# Altium PCB CW308T_MSP430FR5xxx.PcbDoc
Units mil, origin at the board's own origin, x right, y up, seen from the top; angles counter-clockwise.
Board outline 2060 x 2540 mil, 2 copper layers (Top Layer, Bottom Layer); 13 components, 36 nets, 174 pads, 112 vias.
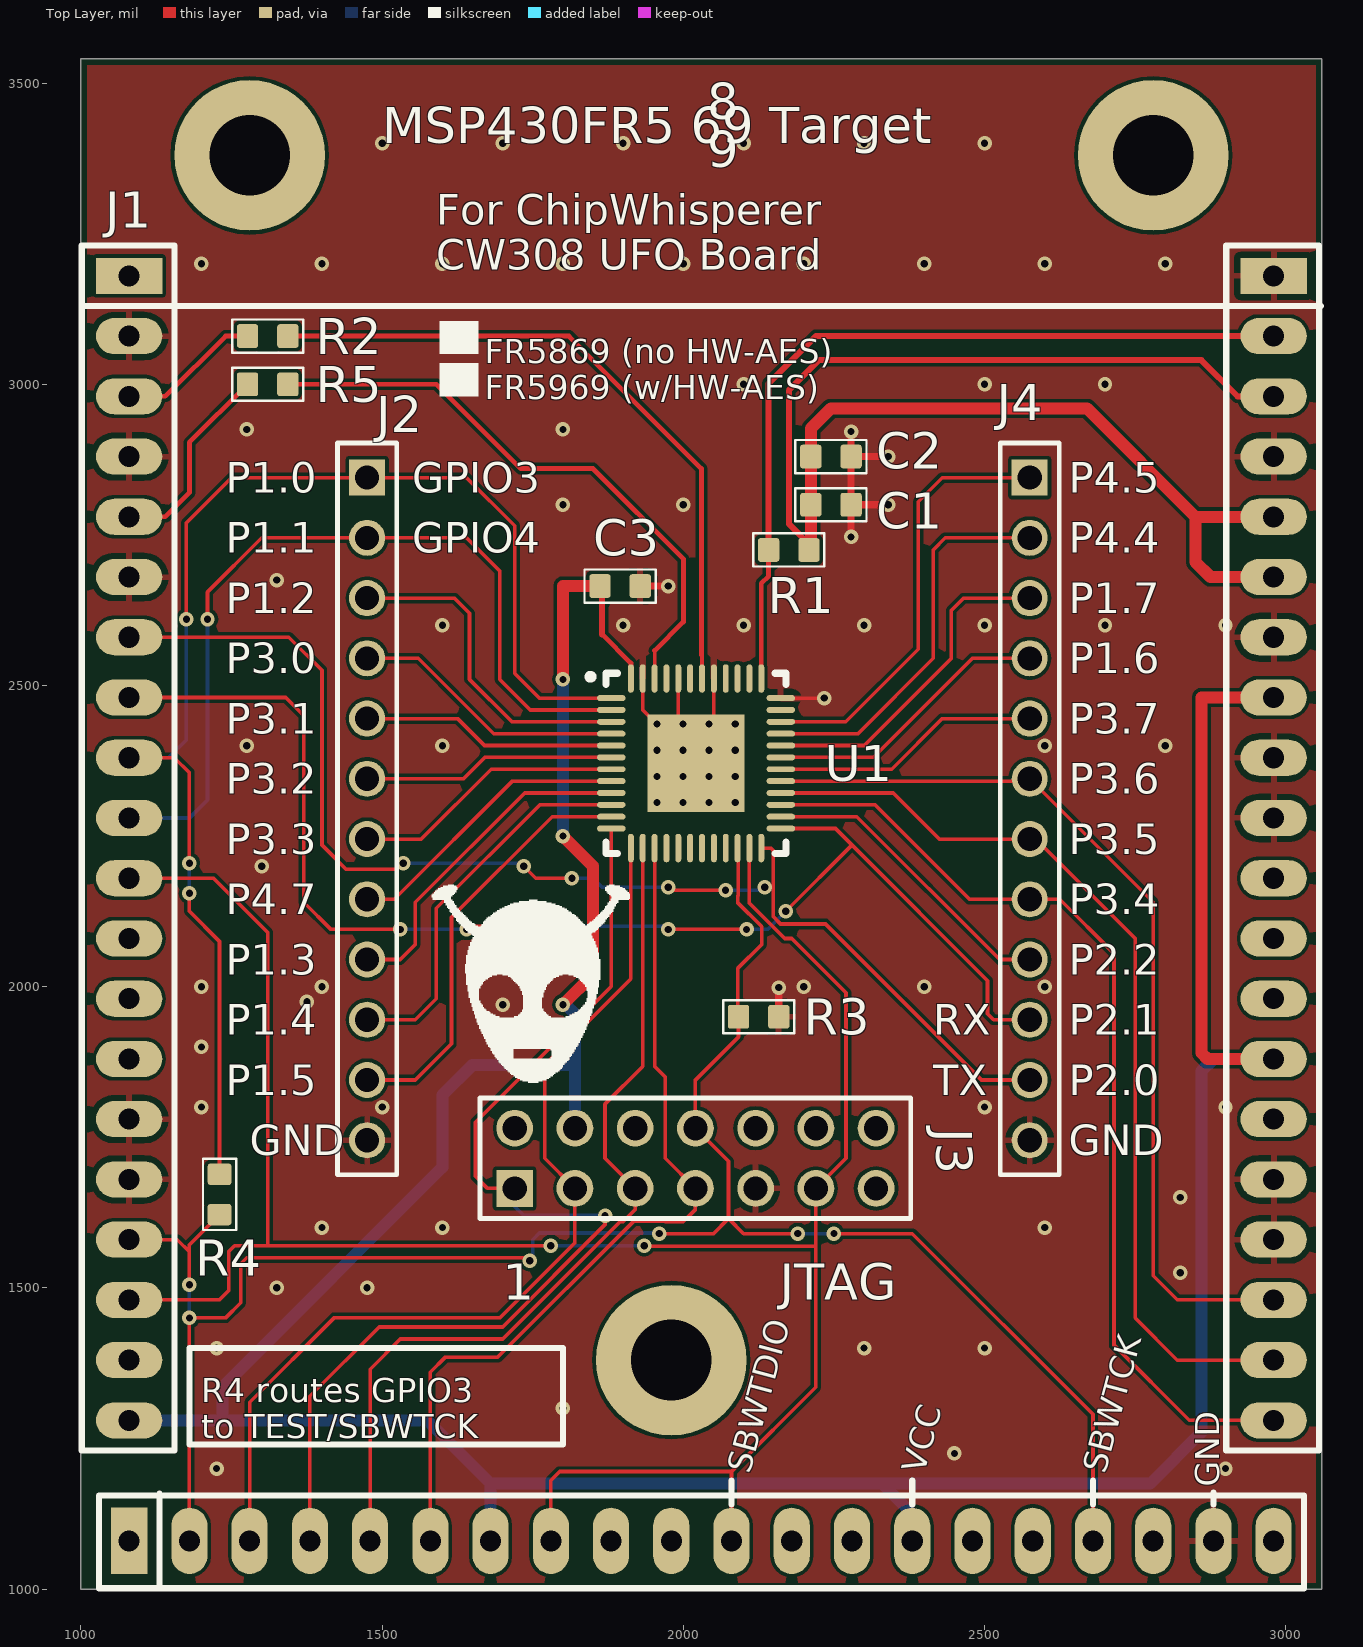
[diagram p0: Top Layer view]
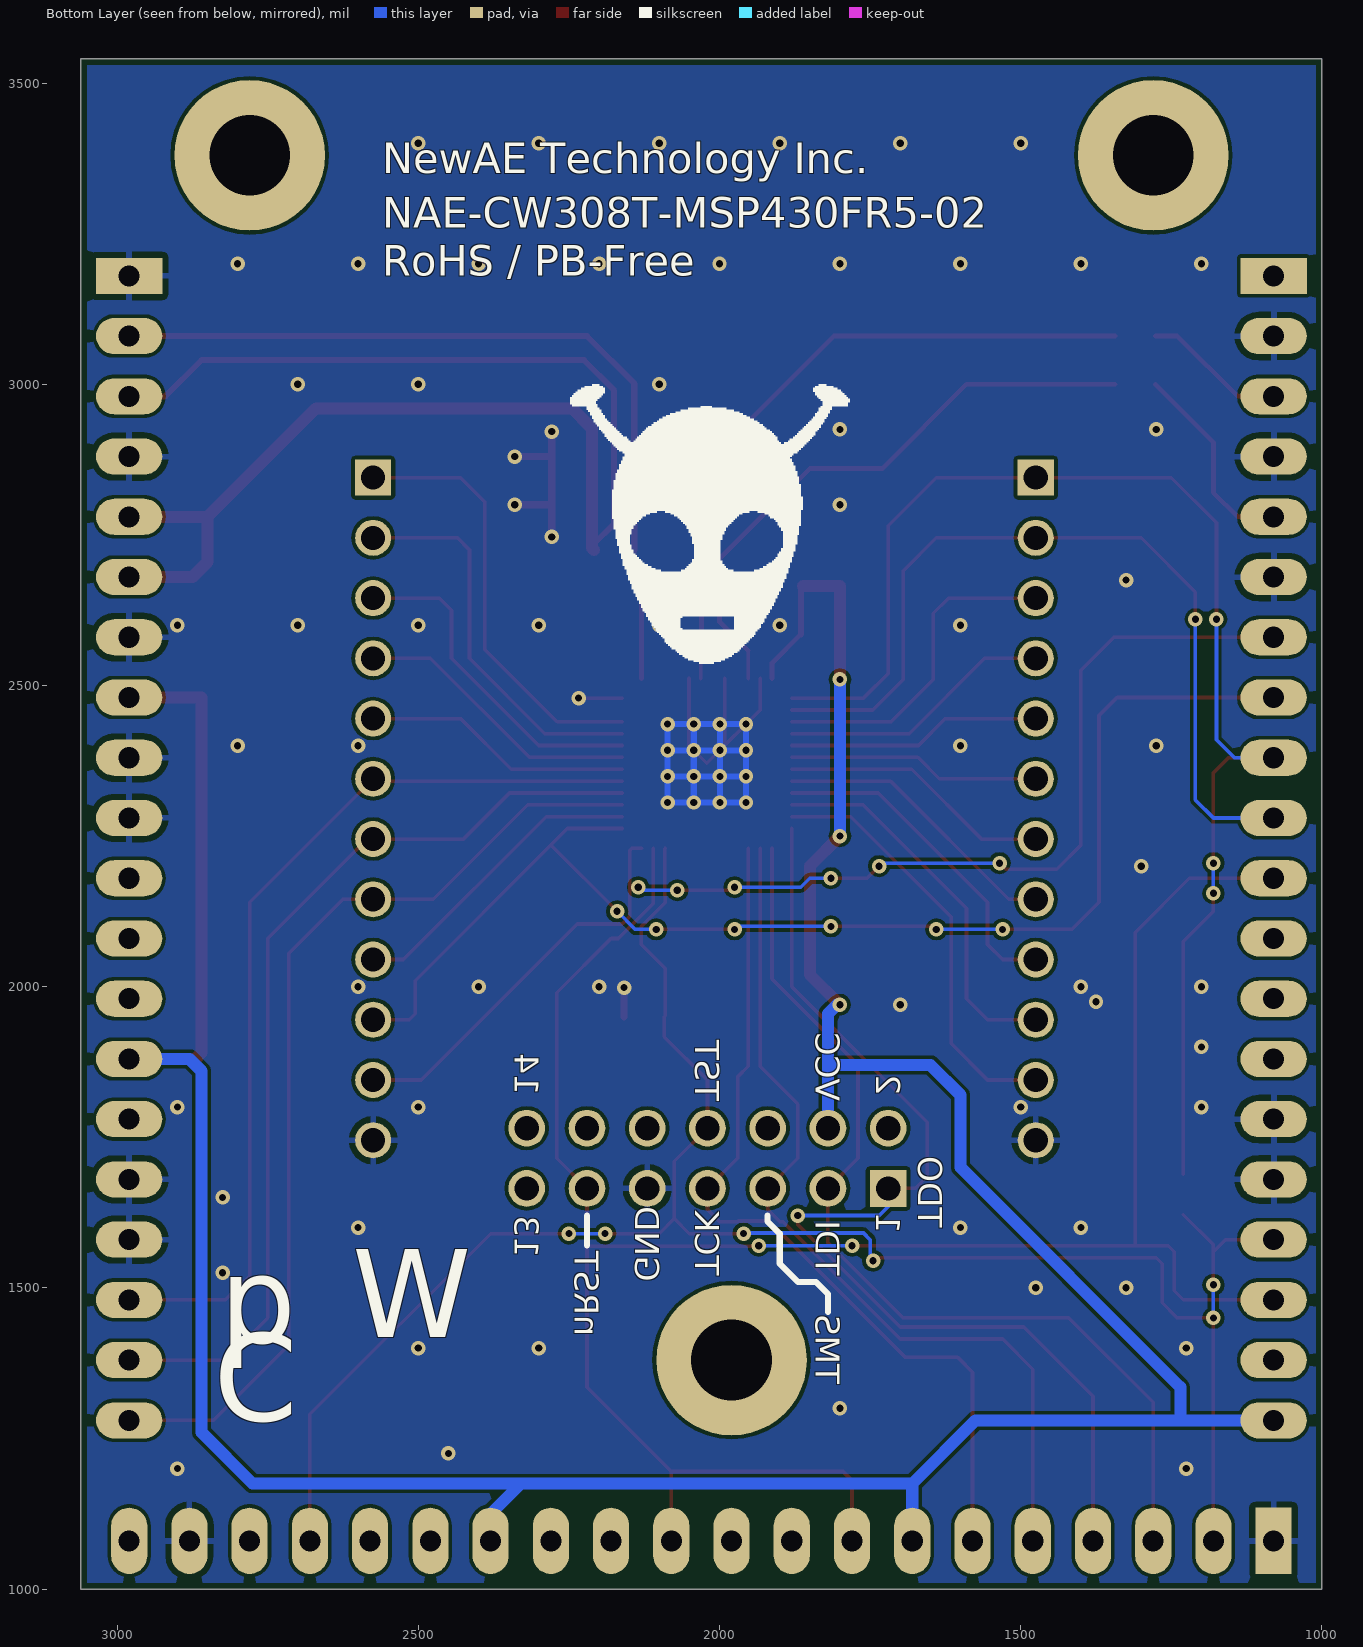
[diagram p1: Bottom Layer view, seen from below]

## Layer stack, top to bottom
Top Solder: solder mask 0.4, Solder Resist, Dk 3.5
Top Layer: signal copper 1.4
Dielectric 1: dielectric 12.6, FR-4, Dk 4.8
Bottom Layer: signal copper 1.4
Bottom Solder: solder mask 0.4, Solder Resist, Dk 3.5

## Board outline
1000,1000 1000,3540 3060,3540 3060,1000

## Design rules (kind name [scope] priority, off if disabled: settings)
BoardOutlineClearance [All] p1: gap=10 ignorepadtopadclearanceinfootprint=FALSE except(0: Arc-SplitContinuation Track-SplitContinuation SMDPad-SplitContinuation THPad-SplitContinuation Via-SplitContinuation Fill-SplitContinuation Poly-SplitContinuation Region-SplitContinuation Text-SplitContinuation)
Clearance [All] p1: gap=6 ignorepadtopadclearanceinfootprint=FALSE except(0: Arc-Hole Track-Hole SMDPad-Hole THPad-Hole Via-Hole Fill-Hole Poly-Hole Region-Hole Text-Hole)
PolygonConnect PolygonConnect_1 [All] p1: thpad.connectstyle=Relief thpad.reliefconductorwidth=10 thpad.reliefentries=4 thpad.polygonreliefangle="90 Angle" thpad.airgapwidth=10 smdpad.connectstyle=Relief smdpad.reliefconductorwidth=10 smdpad.reliefentries=4 smdpad.polygonreliefangle="90 Angle" smdpad.airgapwidth=10 via.connectstyle=Direct via.reliefconductorwidth=10 via.reliefentries=4 via.polygonreliefangle="90 Angle" via.airgapwidth=10
PolygonConnect [All] p2: connectstyle=Relief reliefconductorwidth=10 reliefentries=4 polygonreliefangle="90 Angle" airgapwidth=10
RoutingVias [All] p1: holewidth=15 width=30 viastyle="Through Hole" minholewidth=12 minwidth=24 maxholewidth=28 maxwidth=50
SolderMaskExpansion [All] p1: expansion=4
Width [All] p1: maxlimit=100 minlimit=6 preferedwidth=10 minimp=50.000000 maximp=50.000000 favimp=50.000000
30 further rules are at their usual default settings.

## Components (designator, comment, footprint, x,y, rotation, side; value= is the part's Value field where it differs from the comment)
C1 "approved sub OK" CAPC1608X90N 2245,2800 r0 top value=100n
C2 "approved sub OK" CAPC1608X90N 2245,2880 r0 top value=100n
C3 "approved sub OK" CAPC1608X90N 1895,2665 r0 top value=100n
J1 "CW308_TARGETCON" CW308_TBOARD_CONN 1080,3180 r0 top locked
J2 "MTLW-112-07-F-S-125" SMTC-MTLW-112-07-X-S-125 1475,2845 r270 top
J3 "TSW-107-06-G-D" SMTC-TSW-107-06-X-D 1720,1665 r0 top
J4 "MTLW-112-07-F-S-125" SMTC-MTLW-112-07-X-S-125 2575,2845 r270 top
R1 "Thick Film" RESC1608X55N 2175,2725 r180 top value=51R
R2 "Thick Film" RESC1608X55N 1310,3080 r180 top value=51R
R3 "Thick Film" RESC1608X55N 2125,1950 r0 top value=4K7
R4 "Thick Film" RESC1608X55N 1230,1655 r270 top value=DNM
R5 "Thick Film" RESC1608X55N 1310,3000 r180 top value=51R
U1 "MSP430FR5869" QFN50P700X700X100_HS-49M 2021.1,2370.75 r0 top

## Footprints (in the part's own frame and the unit in brackets; to place one, negate y for a bottom-side part, rotate by r counter-clockwise, add the part's x,y. Pads: shape width x height; smd on the part's side, far side on the other; paste and mask are expansions set on the pad)
CAPC1608X90N [mm] "Chip Capacitor, Body 1.6x0.8mm, EIA 0603, IPC Medium Density"
  round 0.254 on Mech15: 0(0,0)
  rrect25% 0.9x1 smd: 1(-0.85,0) 2(0.85,0)
  Top Layer pour cut-out: -0.6,0.5 -0.4,0.7 0.4,0.7 0.6,0.5 0.6,-0.5 0.4,-0.7 -0.4,-0.7 -0.6,-0.5
  silkscreen extent -1.5,-0.7 1.5,0.7, body extent -0.85,-0.45 0.85,0.45, height 0.89
CW308_TBOARD_CONN [mil]
  rect 110x60 hole 35: A1(0,0) C1(1900,0)
  oval 110x60 hole 35: A2(0,-100) A3(0,-200) A4(0,-300) A5(0,-400) A6(0,-500) A7(0,-600) A8(0,-700) A9(0,-800) A10(0,-900) A11(0,-1000) A12(0,-1100) A13(0,-1200) A14(0,-1300) A15(0,-1400) A16(0,-1500) A17(0,-1600) A18(0,-1700) A19(0,-1800) A20(0,-1900) C2(1900,-100) C3(1900,-200) C4(1900,-300) C5(1900,-400) C6(1900,-500) C7(1900,-600) C8(1900,-700) C9(1900,-800) C10(1900,-900) C11(1900,-1000) C12(1900,-1100) C13(1900,-1200) C14(1900,-1300) C15(1900,-1400) C16(1900,-1500) C17(1900,-1600) C18(1900,-1700) C19(1900,-1800) C20(1900,-1900)
  rect 60x110 hole 35: B1(0,-2100)
  oval 60x110 hole 35: B2(100,-2100) B3(200,-2100) B4(300,-2100) B5(400,-2100) B6(500,-2100) B7(600,-2100) B8(700,-2100) B9(800,-2100) B10(900,-2100) B11(1000,-2100) B12(1100,-2100) B13(1200,-2100) B14(1300,-2100) B15(1400,-2100) B16(1500,-2100) B17(1600,-2100) B18(1700,-2100) B19(1800,-2100) B20(1900,-2100)
  round 250 hole 134: MH1(200,200) MH2(900,-1800) MH2(1700,200)
  silkscreen extent -79,-2179 1979,50, body extent -50,-2150 1950,50, height 224
QFN50P700X700X100_HS-49M [mm] "QFN, 48-Leads, Body 7.00x7.00mm, Pitch 0.50mm, Thermal Pad 4.10x4.10mm, IPC Low Density"
  oval 1.2x0.25 smd: 1(-3.575,2.75) 2(-3.575,2.25) 3(-3.575,1.75) 4(-3.575,1.25) 5(-3.575,0.75) 6(-3.575,0.25) 7(-3.575,-0.25) 8(-3.575,-0.75) 9(-3.575,-1.25) 10(-3.575,-1.75) 11(-3.575,-2.25) 12(-3.575,-2.75) 25(3.575,-2.75) 26(3.575,-2.25) 27(3.575,-1.75) 28(3.575,-1.25) 29(3.575,-0.75) 30(3.575,-0.25) 31(3.575,0.25) 32(3.575,0.75) 33(3.575,1.25) 34(3.575,1.75) 35(3.575,2.25) 36(3.575,2.75)
  oval 0.25x1.2 smd: 13(-2.75,-3.575) 14(-2.25,-3.575) 15(-1.75,-3.575) 16(-1.25,-3.575) 17(-0.75,-3.575) 18(-0.25,-3.575) 19(0.25,-3.575) 20(0.75,-3.575) 21(1.25,-3.575) 22(1.75,-3.575) 23(2.25,-3.575) 24(2.75,-3.575) 37(2.75,3.575) 38(2.25,3.575) 39(1.75,3.575) 40(1.25,3.575) 41(0.75,3.575) 42(0.25,3.575) 43(-0.25,3.575) 44(-0.75,3.575) 45(-1.25,3.575) 46(-1.75,3.575) 47(-2.25,3.575) 48(-2.75,3.575)
  rect 4.1x4.1 smd: 49(0,0)
  silkscreen extent -4.57,-3.8 3.8,3.8, body extent -3.58,-3.58 3.58,3.58, height 1
RESC1608X55N [mm] "Chip Resistor, Body 1.6x0.8mm, EIA 0603, IPC Medium Density"
  round 0.254 on Mech15: 0(0,0)
  rrect25% 0.9x1 smd: 1(-0.85,0) 2(0.85,0)
  Top Layer pour cut-out: -0.6,0.5 -0.4,0.7 0.4,0.7 0.6,0.5 0.6,-0.5 0.4,-0.7 -0.4,-0.7 -0.6,-0.5
  silkscreen extent -1.5,-0.7 1.5,0.7, body extent -0.87,-0.47 0.88,0.48, height 0.54
SMTC-MTLW-112-07-X-S-125 [mm] "Terminal Assembly, 1x12 Pins, Vertical, 2.54mm Pitch, Male"
  rect 1.52x1.52 hole 1.02: 1(0,0)
  round 1.52 hole 1.02: 2(2.54,0) 3(5.08,0) 4(7.62,0) 5(10.16,0) 6(12.7,0) 7(15.24,0) 8(17.78,0) 9(20.32,0) 10(22.86,0) 11(25.4,0) 12(27.94,0)
  silkscreen extent -1.46,-1.24 29.4,1.24, body extent -1.27,-1.24 29.21,1.24, height 4.7
SMTC-TSW-107-06-X-D [mm] ".025 SQ Post Terminal Strip Assembly, 2x7 Pins, Vertical, 2.54mm Pitch, Male"
  rect 1.55x1.55 hole 1.02: 1(0,0)
  round 1.55 hole 1.02: 2(0,2.54) 3(2.54,0) 4(2.54,2.54) 5(5.08,0) 6(5.08,2.54) 7(7.62,0) 8(7.62,2.54) 9(10.16,0) 10(10.16,2.54) 11(12.7,0) 12(12.7,2.54) 13(15.24,0) 14(15.24,2.54)
  silkscreen extent -1.46,-1.27 16.7,3.81, body extent -1.27,-1.27 16.51,3.81, height 5.21

## Part data
C1 C2 C3: library part CAPC_100n_0603_X7R_50V_10%, "Capacitor SMD Cer 100nF 10% 50V X7R 0603", Manufacturer 1="AVX Corporation", Manufacturer 2="TDK Corporation", Manufacturer Part Number 1=06035C104KAT2A, Manufacturer Part Number 2=C1608X7R1H104K, Package / Case="0603 (1608 Metric)", Ratings="50V; X7R", Supplier Part Number 1=478-5052-1-ND, Tolerance=±10%, ComponentLink1Description=http://www.avx.com/docs/Catalogs/cx7r.pdf, ComponentLink1URL=http://www.avx.com/docs/Catalogs/cx7r.pdf, ComponentLink2Description=http://product.tdk.com/capacitor/mlcc/en/documents/mlcc_commercial_general_en.pdf, ComponentLink2URL=http://product.tdk.com/capacitor/mlcc/en/documents/mlcc_commercial_general_en.pdf, Material=ceramic, SCDType=spec, Supplier 1=Digi-Key, Supplier 2=Digi-Key, Supplier Part Number 2=445-1314-1-ND
J1: library part CW308_TBOARD, "CW308 \"Standard\" Target Board Connector"
J2 J4: library part CMP-1024-00086-1, Manufacturer=Samtec, Temperature Range="-55 to 125 degC", ComponentLink1Description="Manufacturer URL", ComponentLink1URL=http://www.samtec.com, ComponentLink2Description=Datasheet, ComponentLink2URL=http://www.samtec.com/documents/webfiles/pdf/MTLW_TH.PDF, ComponentLink3Description="Package Specification", ComponentLink3URL=http://www.samtec.com/documents/webfiles/cpdf/MTLW-1XX-XX-XX-X-XXX-XX-XX-MKT1.pdf, DatasheetVersion=F-214, Mounting Technology=Through-hole, Orientation=Vertical, PackageDescription="Low Profile Terminal Assembly", PackageReference=MTLW-112-07-X-S-125, PackageVersion="T, 6/1991", PartNumber=MTLW-112-07-F-S-125, Pitch="2.54 mm", RoHS=True
J3: library part CMP-1024-00403-1, Manufacturer=Samtec, Temperature Range="-55 to 125 degC", ComponentLink1Description="Manufacturer URL", ComponentLink1URL=http://www.samtec.com, ComponentLink2Description=Datasheet, ComponentLink2URL=http://www.samtec.com/documents/webfiles/pdf/TSW_TH.PDF, ComponentLink3Description="Package Specification", ComponentLink3URL=http://www.samtec.com/documents/webfiles/cpdf/TSW-XXX-XX-XXX-X-XX-XXX-MKT.pdf, DatasheetVersion=F-214, Mounting Technology=Through-hole, Orientation=Vertical, PackageDescription=".025[0.64] SQ. Post Terminal Strip Assembly", PackageReference=TSW-107-06-X-D, PackageVersion="DM, 8/1988", PartNumber=TSW-107-06-G-D, Pitch="2.54 mm", RoHS=True
R1 R2 R4 R5: library part RES_51R_0603_1%, "Resistor SMD chip 51 Ohm 0.1W 1% 0603", Manufacturer 1=Yageo, Manufacturer Part Number 1=RC0603FR-0751RL, Package / Case="0603 (1608 metric)", Ratings="1/10 W", Supplier Part Number 1=311-51.0HRCT-ND, Tolerance=±1%, Material="Thick Film", SCDType=spec, Supplier 1=Digi-Key
R3: library part RES_4K7_0603_5%, "Resistor SMD chip 4.7k Ohm 0.1W 5% 0603", Manufacturer 1=Vishay/Dale, Manufacturer Part Number 1=CRCW06034K70JNEA, Package / Case="0603 (1608 metric)", Ratings="1/10 W", Supplier Part Number 1=541-4.7KGCT-ND, Tolerance=±5%, Material="Thick Film", SCDType=spec, Supplier 1=Digi-Key
U1: library part MSP430FR869, "MSP430, 16-bit MCU, FR sram"

## Via types
v1: diameter 24, hole 12, Top Layer to Bottom Layer, tented both sides, 67 vias
v2: diameter 24, hole 12, Top Layer to Bottom Layer, 29 vias
v3: diameter 23.62, hole 11.81, Top Layer to Bottom Layer, 16 vias

## Nets (pads, with @x,y where several pads share a name; then routed paths per layer and width w, separated by ;. In a path a pad name is that pad's centre, name@x,y a point inside that pad or via, vN(x,y) a via of type N, cw(c..) or ccw(c..) an arc to the next point about the centre after c; other vN are vias at no path point)
GND: C1.2 C2.2 C3.2 J1.A2 J1.A4 J1.A6 J1.A15 J1.A16 J1.B1 J1.B19 J1.C1 J1.C4 J1.C7 J1.C9 J1.C10 J1.C16 J1.C17 J2.12 J3.9 J4.12 R3.2 U1.36 U1.41 U1.44 U1.47 U1.49 | length 1935.1
  Top Layer w6: U1.47 1932.52,2459.33 v3(1956.14,2435.71) U1.49@1991.57,2400.28 ; U1.44 U1.49@1991.57,2400.28 ; v3(2042.76,2392.4) U1.49 v3(1999.45,2392.4) U1.49@1991.57,2400.28 ; U1.49@2050.63,2400.28 U1.41 ; U1.36 v1(2234.02,2479.02)
  Top Layer w12: C3.2 v1(1975,2665) ; R3.2 v1(2158.46,1998.46) ; v1(2278.46,2746.54) C1.2 ; v1(2278.46,2921.54) C2.2 ; v1(2340,2800) C1.2 ; v1(2340,2880) C2.2 ; C1.2 C2.2
  Bottom Layer w10: v3(1956.14,2349.09) v3(1999.45,2349.09) ; v3(1956.14,2349.09) v3(1956.14,2392.4) ; v3(1956.14,2349.09) v3(1956.14,2305.79) v3(1999.45,2305.79) ; v3(1956.14,2392.4) v3(1999.45,2392.4) ; v3(1956.14,2392.4) v3(1956.14,2435.71) v3(1999.45,2435.71) ; v3(1999.45,2305.79) v3(1999.45,2349.09) ; v3(1999.45,2305.79) v3(2042.76,2305.79) ; v3(1999.45,2349.09) v3(1999.45,2392.4) ; v3(1999.45,2349.09) v3(2042.76,2349.09) ; v3(1999.45,2392.4) v3(1999.45,2435.71) ; v3(1999.45,2392.4) v3(2042.76,2392.4) ; v3(1999.45,2435.71) v3(2042.76,2435.71) ; v3(2042.76,2305.79) v3(2042.76,2349.09) ; v3(2042.76,2305.79) v3(2086.06,2305.79) v3(2086.06,2349.09) ; v3(2042.76,2349.09) v3(2042.76,2392.4) ; v3(2042.76,2349.09) v3(2086.06,2349.09) ; v3(2042.76,2392.4) v3(2042.76,2435.71) ; v3(2042.76,2392.4) v3(2086.06,2392.4) ; v3(2042.76,2435.71) v3(2086.06,2435.71) v3(2086.06,2392.4) ; v3(2086.06,2349.09) v3(2086.06,2392.4)
  other v1: 1225,1200 2900,1200 2450,1225 1800,1300 1225,1400 2300,1400 2500,1400 1325,1500 1475,1500 2825,1525 1400,1600 1600,1600 2600,1600 2825,1650 1200,1800 1500,1800 2500,1800 2900,1800 1200,1900 1375,1975 1200,2000 1400,2000 2200,2000 2400,2000 2600,2000 1300,2200 1275,2400 1600,2400 2600,2400 2800,2400 1600,2600 1900,2600 2100,2600 2300,2600 2500,2600 2700,2600 2900,2600 1325,2675 1800,2800 2000,2800 1275,2925 1800,2925 2100,3000 2500,3000 2700,3000 1200,3200 1400,3200 1600,3200 1800,3200 2000,3200 2200,3200 2400,3200 2600,3200 2800,3200 1500,3400 1700,3400 1900,3400 2100,3400 2300,3400 2500,3400
  other v2: 1700,1970
NetC1_1: C1.1 C2.1 J1.C3 J1.C5 J1.C6 R1.1 | length 2404.5
  Top Layer w10: R1.1 2208.46,2734.84 2175,2768.31 2175,2990 2225,3040 2860,3040 2920,2980 J1.C3
  Top Layer w20: R1.1 2211.54,2728.07 C1.1 C2.1 2211.54,2926.54 2245,2960 2670,2960 2850,2780 ; J1.C6 2875,2680 2850,2705 2850,2780 ; J1.C5 2850,2780
NetJ1_A3: J1.A3 R2.2 | length 238
  Top Layer w8: J1.A3 1140,2980 1240,3080 R2.2
NetJ1_A5: J1.A5 R5.2 | length 336.6
  Top Layer w8: J1.A5 1140,2780 1180,2820 1180,2903.46 R5.2
NetJ1_C2: J1.C2 R1.2 U1.37 | length 1366
  Top Layer w8: U1.37 2129.37,2669.37 2141.54,2681.54 R1.2
  Top Layer w10: R1.2 2141.54,3001.54 2220,3080 J1.C2
NetR2_1: R2.1 U1.42 | length 1126.6
  Top Layer w6: 2030,2550 2030.94,2549.06 U1.42
  Top Layer w8: R2.1 1810,3080 2030,2860 2030,2550
NetR5_1: R5.1 U1.46 | length 995
  Top Layer w6: U1.46 1952.2,2557.8
  Top Layer w8: R5.1 1590,3000 1730,2860 1850,2860 2000,2710 2000,2605.59 1952.2,2557.8
NRST: J1.A11 J1.A18 J1.B8 J1.B11 J3.11 U1.23 | length 3711.6
  Top Layer w6: J1.A18 1230,1480 1245,1495 1245,1560 1255,1570 1310,1570 ; J1.A11 1220,2180 1310,2090 1310,1570 ; J1.B8 1780,1180 1795,1195 2080,1195 ; v2(1780,1570) 1310,1570 ; v2(1935,1570) 1936,1569 2219,1569 2220,1570 ; J1.B11 2080,1195 ; U1.23 2109.68,2138.65 2168.33,2080 2180,2080 2270,1990 2270,1715 J3.11 2220,1570 ; 2080,1195 2220,1335 2220,1570
  Bottom Layer w6: v2(1780,1570) v2(1935,1570)
P1.0: J1.A9 J2.1 R4.1 U1.1 | length 2296.6
  Top Layer w6: J1.A9 1155,2380 1180,2355 v2(1180,2205) ; v2(1175,2610) 1175,2770 1250,2845 J2.1 1640,2845 1720,2765 1720,2520 1760.98,2479.02 U1.1 ; v2(1180,2155) 1180,2125 1230,2075 R4.1
  Bottom Layer w6: J1.A9 1145,2380 1175,2410 v2(1175,2610) ; v2(1180,2155) v2(1180,2205)
P1.1: J1.A10 J2.2 U1.2 | length 1418.8
  Top Layer w6: v2(1210,2610) 1210,2655 1300,2745 J2.2 1640,2745 1695,2690 1695,2510 1745.67,2459.33 U1.2
  Bottom Layer w6: J1.A10 1180,2280 1210,2310 v2(1210,2610)
P1.2: J2.3 U1.3 | length 554.9
  Top Layer w6: J2.3 1620,2645 1645,2620 1645,2510 1715.35,2439.65 U1.3
P1.3: J2.9 U1.9 | length 560.9
  Top Layer w6: J2.9 1530,2045 1555,2070 1555,2140 1736.54,2321.54 U1.9
P1.4: J2.10 U1.10 | length 641
  Top Layer w6: J2.10 1555,1945 1590,1980 1590,2130 1761.85,2301.85 U1.10
P1.5: J2.11 U1.11 | length 709.4
  Top Layer w6: J2.11 1555,1845 1615,1905 1615,2115 1782.17,2282.17 U1.11
P1.6: J4.4 U1.31 | length 481.3
  Top Layer w6: U1.31 2315.59,2380.59 2480,2545 J4.4
P1.7: J4.3 U1.32 | length 561.4
  Top Layer w6: U1.32 2300.28,2400.28 2445,2545 2445,2625 2465,2645 J4.3
P2.2: J4.9 U1.26 | length 511.4
  Top Layer w6: U1.26 2287.83,2282.17 2525,2045 J4.9
P3.0: J2.4 U1.4 | length 457.1
  Top Layer w6: J2.4 1560,2545 1685.04,2419.96 U1.4
P3.1: J2.5 U1.5 | length 423.9
  Top Layer w6: J2.5 1625,2445 1669.72,2400.28 U1.5
P3.2: J2.6 U1.6 | length 420.1
  Top Layer w6: J2.6 1635,2345 1670.59,2380.59 U1.6
P3.3: J2.7 U1.7 | length 453.4
  Top Layer w6: J2.7 1565,2245 1680.91,2360.91 U1.7
P3.4: J1.C20 J4.8 U1.27 | length 1622.2
  Top Layer w6: U1.27 2318.15,2301.85 2475,2145 J4.8 2625,2145 2715,2055 2715,1405 2840,1280 J1.C20
P3.5: J1.C19 J4.7 U1.28 | length 1577.2
  Top Layer w6: U1.28 2348.46,2321.54 2425,2245 J4.7 2585,2245 2750,2080 2750,1450 2820,1380 J1.C19
P3.6: J1.C18 J4.6 U1.29 | length 1541.2
  Top Layer w6: U1.29 2571.22,2341.22 J4.6 2780,2140 2780,1520 2820,1480 J1.C18
P3.7: J4.5 U1.30 | length 448
  Top Layer w6: U1.30 2345.91,2360.91 2430,2445 J4.5
P4.4: J4.2 U1.33 | length 653.2
  Top Layer w6: U1.33 2289.96,2419.96 2415,2545 2415,2725 2435,2745 J4.2
P4.5: J4.1 U1.34 | length 724.6
  Top Layer w6: U1.34 2269.65,2439.65 2390,2560 2390,2805 2430,2845 J4.1
P4.7: J2.8 U1.8 | length 486.6
  Top Layer w6: J2.8 1520,2145 1716.22,2341.22 U1.8
RX: J1.A8 J4.10 U1.25 | length 2180.1
  Top Layer w6: J1.A8 1340,2480 1370,2450 1370,2140 1415,2095 v2(1530,2095) ; v2(1640,2095) 1645,2100 v2(1815,2100) ; v2(1975,2095) v2(2105,2095) ; U1.25 2252.52,2262.48 2280,2235 ; v2(2170,2125) 2280,2235 ; J4.10 2515,1945 2505,1955 2505,2010 2280,2235
  Bottom Layer w6: v2(1530,2095) v2(1640,2095) ; v2(1815,2100) 1970,2100 v2(1975,2095) ; v2(2105,2095) 2140,2095 v2(2170,2125)
SWTCK: J1.A17 J1.B2 J1.B17 J3.8 R3.1 R4.2 U1.22 | length 3349.1
  Top Layer w6: J1.A17 1160,1580 1180,1560 ; J1.B2 v2(1180,1450) 1240,1450 1265,1475 1265,1540 1275,1550 1740,1550 v2(1745,1545) ; v2(1180,1505) 1180,1560 ; R4.2 1180,1571.54 1180,1560 ; v2(1960,1590) 2050,1590 2075,1615 ; U1.22 2091,2229 2091,2151.3 2090,2150.3 2090,2139.7 2130,2099.7 2130,2070 2090,2030 2090,1951.54 R3.1 2091.54,1916.54 2020,1845 J3.8 2075,1710 2075,1615 ; v2(2190,1590) 2100,1590 2075,1615 ; v2(2250,1590) 2380,1590 2680,1290 J1.B17
  Bottom Layer w6: v2(1180,1450) v2(1180,1505) ; v2(1745,1545) 1750,1545 1750,1580 1761,1591 1959,1591 v2(1960,1590) ; v2(2190,1590) v2(2250,1590)
TCK: J1.B6 J3.7 U1.15 | length 1460.7
  Top Layer w6: J1.B6 1580,1360 1605,1385 1691.97,1385 1917.97,1611 1968.7,1611 1969.7,1610 2000,1610 2020,1630 J3.7 1970,1715 1970,1850 1952.2,1867.8 U1.15
TDI: J1.B3 J3.3 U1.13 | length 1614.6
  Top Layer w6: J1.B3 1280,1310 1420,1450 1695,1450 1820,1575 J3.3 1770,1715 1770,1870 1912.83,2012.83 U1.13
TDO: J1.B4 J3.1 U1.12 | length 1793.4
  Top Layer w6: J1.B4 1380,1320 1495,1435 1700,1435 1870,1605 v2(1870,1620) ; J3.1 1675,1665 1655,1685 1655,1775 1880.35,2000.35 U1.12
  Bottom Layer w6: J3.1 1720,1635 1735,1620 v2(1870,1620)
TMS: J1.B5 J3.5 U1.14 | length 1481.4
  Top Layer w6: J1.B5 1480,1365 1530,1415 1700,1415 1895,1610 1900,1610 1920,1630 J3.5 1870,1715 1870,1805 1932.52,1867.52 U1.14
TX: J1.A7 J4.11 U1.24 | length 2095.5
  Top Layer w6: J1.A7 1345,2580 1400,2525 1400,2235 1440,2195 1525,2195 v2(1535,2205) ; v2(1735,2200) 1755,2180 v2(1815,2180) ; v2(1975,2165) 1980,2160 v2(2070,2160) ; U1.24 2145,2230 2149,2226 2149,2165 ; v2(2135,2165) 2149,2165 ; J4.11 2495,1845 2236,2104 2161.3,2104 2149,2116.3 2149,2165
  Bottom Layer w6: v2(1535,2205) v2@1740,2205 ; v2(1815,2180) 1850,2180 1865,2165 v2(1975,2165) ; v2(2070,2160) 2130,2160 v2(2135,2165)
VCC: C3.1 J1.A20 J1.B7 J1.B14 J1.C8 J1.C14 J3.4 U1.48 | length 5752.7
  Top Layer w8: 1865,2585 1912.83,2537.17 U1.48
  Top Layer w10: C3.1 1865,2661.54 1865,2585
  Top Layer w20: v2(1800,1970) 1850,2020 1850,2200 v2(1800,2250) ; v2(1800,2510) 1800,2665 C3.1 ; J1.C14 2870,1880 2860,1890 2860,2480 J1.C8
  Bottom Layer w20: J1.A20 1235,1280 ; J1.B7 1680,1175 ; v2(1800,1970) 1805,1970 1820,1955 1820,1870 ; v2(1800,2250) v2(1800,2510) ; J3.4 1820,1870 ; J1.B14 2380,1125 2330,1175 ; J1.C14 2880,1880 2860,1860 2860,1260 2775,1175 2330,1175 ; 1235,1280 1235,1335 1600,1700 1600,1820 1650,1870 1820,1870 ; 1235,1280 1575,1280 1680,1175 ; 1680,1175 2330,1175
pads on no net: C1.0 C2.0 C3.0 J1.A1 J1.A12 J1.A13 J1.A14 J1.A19 J1.B9 J1.B10 J1.B12 J1.B13 J1.B15 J1.B16 J1.B18 J1.B20 J1.C11 J1.C12 J1.C13 J1.C15 J1.MH1 J1.MH2 J3.2 J3.6 J3.10 J3.12 J3.13 J3.14 R1.0 R2.0 R3.0 R4.0 R5.0 U1.16 U1.17 U1.18 U1.19 U1.20 U1.21 U1.35 U1.38 U1.39 U1.40 U1.43 U1.45

## Polygon pours and split planes (outlines as drawn)
GND on Bottom Layer "GND_BOT" (solid, pour order 0): 970,3645 3200,3645 3200,990 3105,895 3065,855 905,855
GND on Top Layer "GND_TOP" (solid, pour order 2): 950,3685 965,3670 3260,3670 3260,1060 3135,935 3060,860 970,860

## Silkscreen, mask and mechanical layers (free items; w line width, h text height)
Top Overlay:
  drawing of 12 lines, arcs and shapes, not listed
  text "8" at 2040,3440 h60
  text "MSP430FR5 69 Target" at 1500,3400 h60
  text "9" at 2040,3360 h60
  text "For ChipWhisperer / CW308 UFO Board" at 1590,3190 h50
  text "FR5869 (no HW-AES) / FR5969 (w/HW-AES)" at 1670,2975 h40
  text "P1.0" at 1240,2820 h50
  text "GPIO3" at 1550,2820 h50
  text "P4.5" at 2640,2820 h50
  text "P1.1" at 1240,2720 h50
  text "GPIO4" at 1550,2720 h50
  text "P4.4" at 2640,2720 h50
  text "P1.2" at 1240,2620 h50
  text "P1.7" at 2640,2620 h50
  text "P3.0" at 1240,2520 h50
  text "P1.6" at 2640,2520 h50
  text "P3.1" at 1240,2420 h50
  text "P3.7" at 2640,2420 h50
  text "P3.2" at 1240,2320 h50
  text "P3.6" at 2640,2320 h50
  text "P3.3" at 1240,2220 h50
  text "P3.5" at 2640,2220 h50
  text "P4.7" at 1240,2120 h50
  text "P3.4" at 2640,2120 h50
  text "P1.3" at 1240,2020 h50
  text "P2.2" at 2640,2020 h50
  text "P1.4" at 1240,1920 h50
  text "RX" at 2415,1920 h50
  text "P2.1" at 2640,1920 h50
  text "P1.5" at 1240,1820 h50
  text "TX" at 2415,1820 h50
  text "P2.0" at 2640,1820 h50
  text "GND" at 1280,1720 h50
  text "GND" at 2640,1720 h50
  text "1" at 1700,1480 h60
  text "JTAG" at 2160,1480 h60
  text "R4 routes GPIO3 / to TEST/SBWTCK" at 1200,1250 h40
  text "SBWTDIO" at 2110,1190 h40 r75
  text "VCC" at 2400,1190 h40 r75
  text "SBWTCK" at 2700,1190 h40 r75
  text "GND" at 2890,1170 h40 r90
Bottom Overlay:
  drawing of 9 lines, arcs and shapes, not listed
  text "NewAE Technology Inc." at 2560,3350 h50
  text "NAE-CW308T-MSP430FR5-02" at 2560,3260 h50
  text "RoHS / PB-Free" at 2560,3180 h50
  text "2" at 1740,1820 h40 r90
  text "14" at 2340,1820 h40 r90
  text "VCC" at 1840,1810 h40 r90
  text "TST" at 2040,1810 h40 r90
  text "TDO" at 1670,1600 h40 r90
  text "1" at 1740,1590 h40 r90
  text "13" at 2340,1550 h40 r90
  text "TDI" at 1840,1520 h40 r90
  text "TCK" at 2040,1520 h40 r90
  text "GND" at 2140,1510 h40 r90
  text "nRST" at 2240,1420 h40 r90
  text "W" at 2610,1370 h250
  text "p" at 2830,1360 h250
  text "TMS" at 1840,1340 h40 r90
  text "C" at 2840,1230 h250
Mechanical 1:
  the board outline again, w5